# Altium PCB motorRegulator.PcbDoc
Units mil, origin at the board's own origin, x right, y up, seen from the top; angles counter-clockwise.
Board outline 1905 x 1465 mil, 2 copper layers (Top Layer, GND); 22 components, 11 nets, 56 pads, 23 vias.
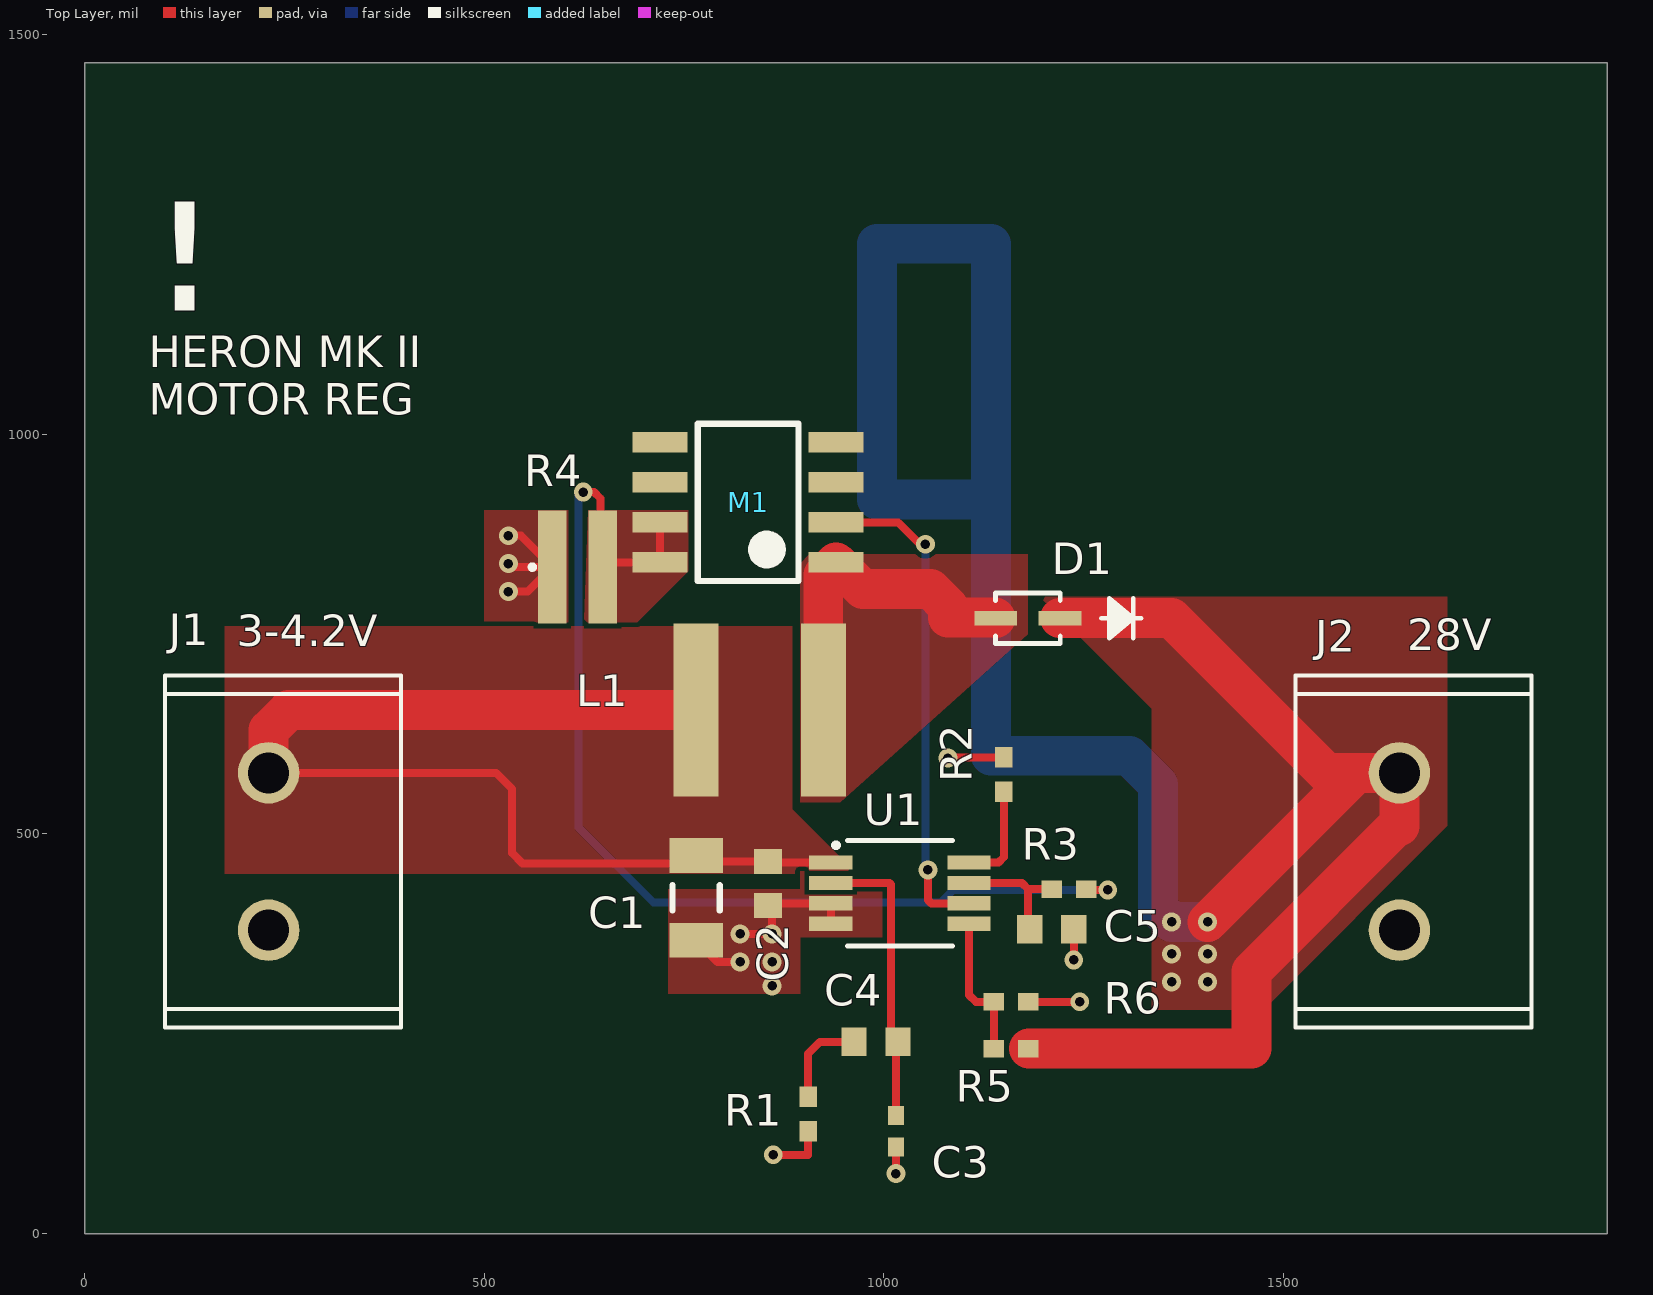
[diagram p0: Top Layer view]
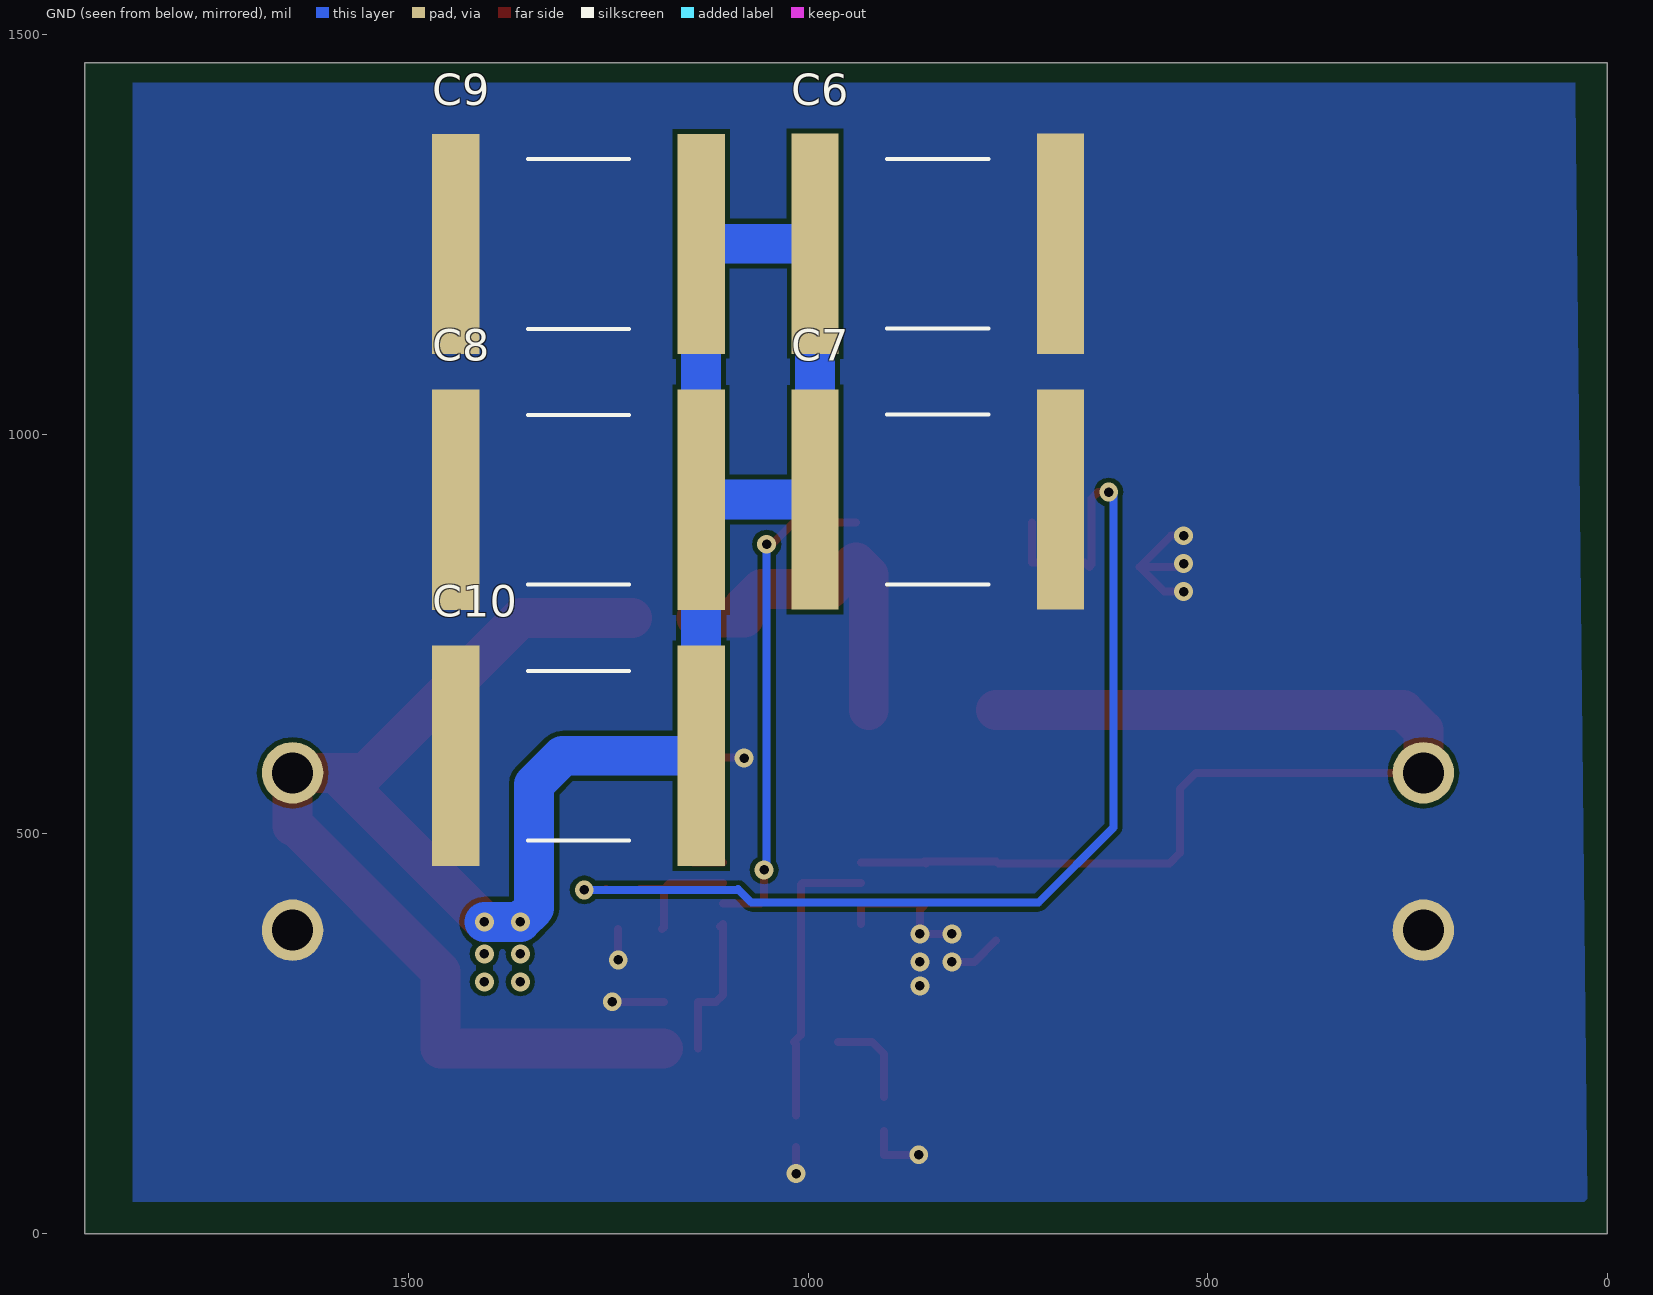
[diagram p1: GND view, seen from below]
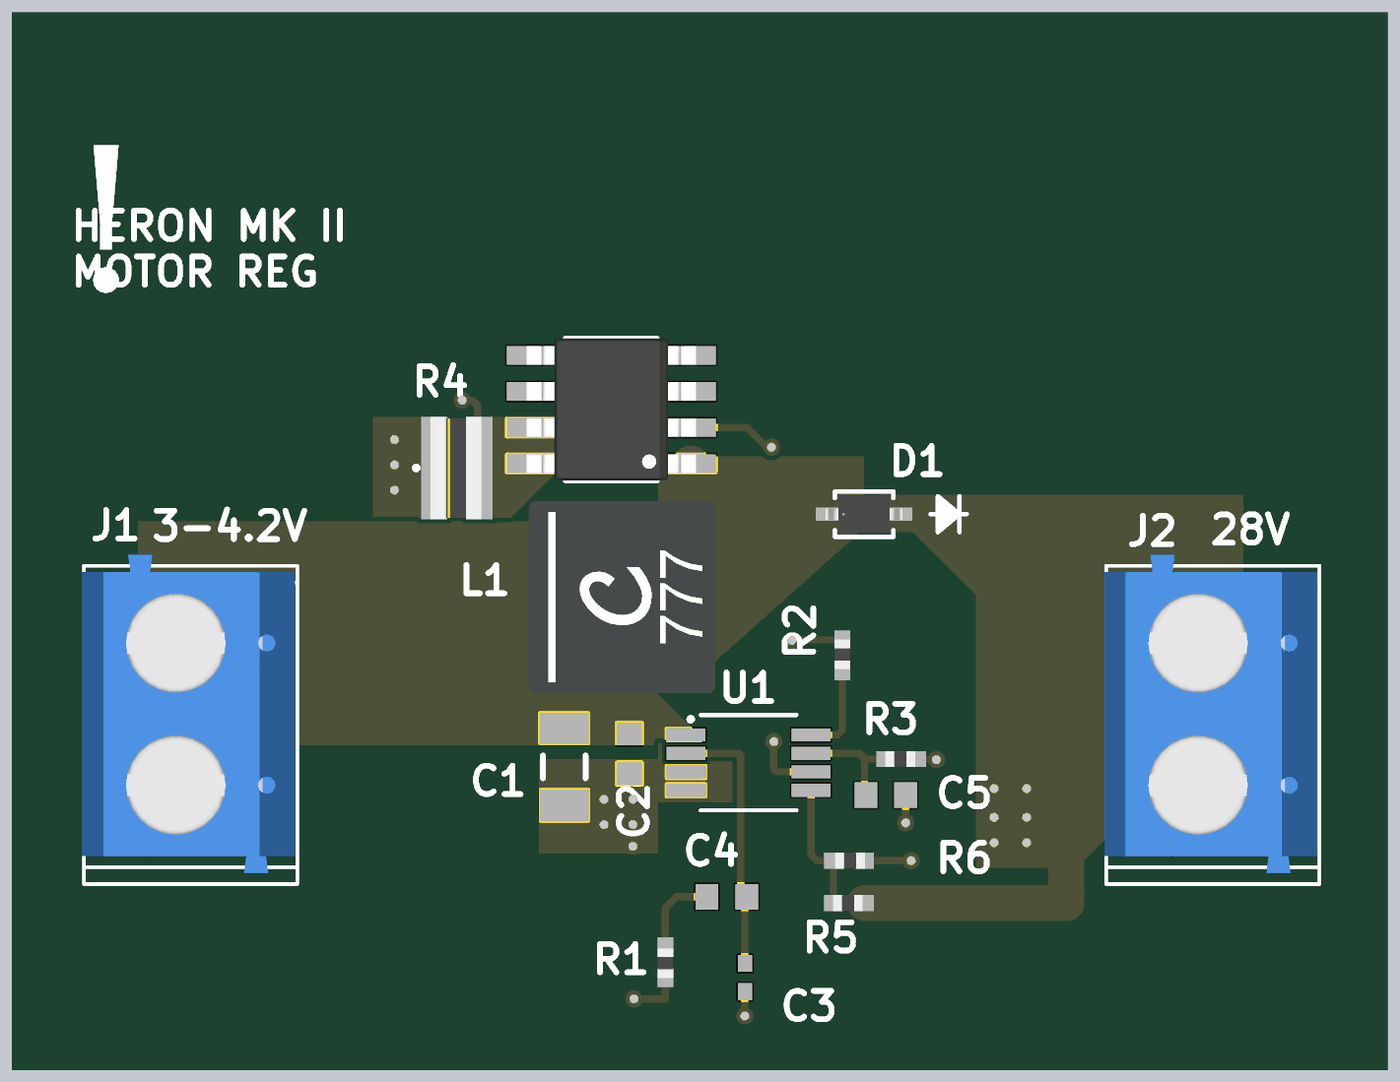
[diagram p2: 3D render of the assembled board from above, using the file's embedded part models]

## Layer stack, top to bottom
Top Solder: solder mask 0.4, Solder Resist, Dk 3.5
Top Layer: signal copper 1.4
Dielectric 1: dielectric 12.6, FR-4, Dk 4.8
GND: signal copper 1.4
Bottom Solder: solder mask 0.4, Solder Resist, Dk 3.5

## Board outline
0,0 0,1465 1905,1465 1905,0

## Design rules (kind name [scope] priority, off if disabled: settings)
AssemblyTestPointUsage [All] p1 off:
AssemblyTestpoint [All] p1 off: testpointundercomponent=TRUE minsize=40 maxsize=100 preferedsize=60 minholesize=0 maxholesize=40 preferedholesize=32 testpointgrid=1 usegrid=TRUE gridtolerance=0.01 allowsidetop=TRUE allowsidebottom=TRUE
BoardOutlineClearance [OnLayer('VCC') or OnLayer('GND')] p1: gap=20 ignorepadtopadclearanceinfootprint=FALSE // Inner layer clearance
BoardOutlineClearance BoardOutlineClearance_1 [All] p2: gap=15 ignorepadtopadclearanceinfootprint=FALSE // top and bottom layers
Clearance [All] p1: gap=6 ignorepadtopadclearanceinfootprint=FALSE
FabricationTestPointUsage [All] p1 off: valid=0 allowmultiple=FALSE
FabricationTestpoint [All] p1 off: side=3 testpointundercomponent=FALSE minsize=40 maxsize=100 preferedsize=60 minholesize=0 maxholesize=40 preferedholesize=32 testpointgrid=1 allowsidetop=TRUE allowsidebottom=TRUE usegrid=TRUE gridtolerance=0.01
HoleSize [All] p1: absolutevalues=TRUE maxlimit=248.03 minlimit=11.81 maxpercent=80.000 minpercent=20.000
HoleToHoleClearance [All] p1: gap=10 allowstackedmicrovias=FALSE
MinimumAnnularRing [All] p1: minimumring=6
MinimumSolderMaskSliver [All] p1: minsoldermaskwidth=4
PlaneConnect [All] p1: planeconnectstyle=Direct reliefexpansion=20 reliefentries=4 reliefconductorwidth=10 reliefairgap=10
PolygonConnect [All] p1: connectstyle=Direct reliefconductorwidth=10 reliefentries=4 polygonreliefangle="90 Angle" airgapwidth=10
RoomDefinition "30V Output Design" [InComponentClass('30V Output Design')] p1: confinementstyle=ConfineIn formatcopy=TRUE lockcomponents=FALSE outline 80.24,237.77 80.24,723.56 544,723.56 544,914.87 636.81,914.87 636.81,1394.6 1038.78,1394.6 1038.78,1394.25 1488.19,1394.25 1488.19,723.56 1830.2,723.56 1830.2,237.78 1203.47,237.78 1203.47,210.37 1049.21,210.37 1049.21,206.38 1040.75,206.38 1040.75,80.69 989.25,80.69 989.25,105.09 884,105.09 884,237.77
RoutingVias [All] p1: holewidth=11.81 width=23.62 viastyle="Through Hole" minholewidth=7.87 minwidth=23.62 maxholewidth=248.03 maxwidth=393.7
SilkToSilkClearance [All] p1: silktosilkclearance=0
SilkToSolderMaskClearance [IsPad] p1: minsilkscreentomaskgap=3 clearancetoexposedcopper=TRUE
SolderMaskExpansion [All] p1: expansion=2.5
UnConnectedPin [All] p1:
UnRoutedNet [All] p1: checkbadconnections=TRUE
Width [All] p1: maxlimit=100 minlimit=6 preferedwidth=10
19 further rules are at their usual default settings.

## Components (designator, comment, footprint, x,y, rotation, side; value= is the part's Value field where it differs from the comment)
C1 "Input cap" C1206 765,420 r90 top value=220uF
C2 "bypass cap" 1608[0603] 855,438.09 r90 top value=100nF
C3 "CL05C681JB5NNNC" 0402 1015,128.09 r90 top value=680pF
C4 "Cap Semi" 1608[0603] 990,240 r0 top value=15nF
C5 "CL21C100JBANNNC" 1608[0603] 1210,380.9 r180 top value=10pF
C6 "Cap Semi" "CAP-2 J-lead" 835,1238.26 r0 bottom value=47uF
C7 "" "CAP-2 J-lead" 835,918.26 r0 bottom value=47uF
C8 "" "CAP-2 J-lead" 1290,918.62 r180 bottom value=47uF
C9 "" "CAP-2 J-lead" 1290,1238.62 r180 bottom value=47uF
C10 "" "CAP-2 J-lead" 1290,598.26 r180 bottom value=47uF
D1 "PMEG6010CEH,115" SOD323F 1180,770 r180 top value=570mV
J1 "691102710002" CON2_SCREW_5.00MM_691102710002 230,478.09 r270 top
J2 "691102710002" CON2_SCREW_5.00MM_691102710002 1645,478.09 r270 top
L1 "Inductor" XAL6060-472 765,655 r0 top value=4.7uH
M1 "MotorFET" MotorFETSOIC127P590X175-8N 830,915 r180 top
R1 "" RES_CRCW_0402 905,128.09 r90 top value=12.1K
R2 "Rfadj" RES_CRCW_0402 1150,595.9 r270 top value=26.7K
R3 "Rfilt" RES_CRCW_0402 1210,430.9 r0 top value=97.6
R4 "PRL1632-R006-F-T1" RES_3216 585,834 r0 top value=Value
R5 "Rfb1" RES_CRCW_0402 1137.47,231.37 r0 top value=22.6K
R6 "Rfb2" RES_CRCW_0402 1180.47,290 r180 top value=976
U1 "Part Number: LM3478MMX/NOPB" MUA08A 1020,425.9 r0 top value=Value

## Footprints (in the part's own frame and the unit in brackets; to place one, negate y for a bottom-side part, rotate by r counter-clockwise, add the part's x,y. Pads: shape width x height; smd on the part's side, far side on the other; paste and mask are expansions set on the pad)
0402 [mm] "Chip Capacitor, Body 1.0x0.5mm, IPC High Density"
  rect 0.6x0.5 smd: 1(-0.5,0) 2(0.5,0)
  body extent -0.55,-0.3 0.55,0.3, height 1.3
1608[0603] [mm] "Chip Capacitor, Body 1.6x0.8mm, IPC High Density"
  rect 0.8x0.9 smd: 1(-0.7,0) 2(0.7,0)
  body extent -0.87,-0.48 0.87,0.48, height 1.3
C1206 [mm] "Chip Capacitor, Body 3.2x1.6mm, IPC High Density"
  rect 1.1x1.7 smd: 1(-1.35,0) 2(1.35,0)
  silkscreen extent -0.4,-0.75 0.4,0.75, body extent -1.7,-0.9 1.7,0.9, height 1.3
"CAP-2 J-lead" [mm] "KTJ500B476M76BFT00, 6.60mm x 7.80mm, Ceramic Capacitor X7R Stacked SMD, 2 J-Lead"
  rect 1.5x7 smd: 1(-3.829,-0.009) 2(3.971,-0.009)
  silkscreen extent -1.54,-2.71 1.68,2.69, body extent -3.86,-3.3 3.96,3.09, height 8.5
CON2_SCREW_5.00MM_691102710002 [mm] "2-Pos Screw terminal 5mm pitch"
  round 1.95 hole 1.3: 1(-2.5,0) 2(2.5,0)
  silkscreen extent -5.6,-3.3 5.6,4.2, body extent -5.98,-3.37 5.22,4.13, height 10.03
MotorFETSOIC127P590X175-8N [mm] "SOIC, 8-Leads, Body 4.90x3.90mm, Pitch 1.27mm, IPC Medium Density"
  rect 1.75x0.65 smd: 1(-2.8,1.905) 2(-2.8,0.635) 3(-2.8,-0.635) 4(-2.8,-1.905) 5(2.8,-1.905) 6(2.8,-0.635) 7(2.8,0.635) 8(2.8,1.905)
  silkscreen extent -1.6,-2.5 1.6,2.5, body extent -2.98,-2.5 2.98,2.5, height 1.75
MUA08A [mil]
  rect 54x18 smd: 1(-86.5,38.39) 2(-86.5,12.8) 3(-86.5,-12.8) 4(-86.5,-38.39) 5(86.5,-38.39) 6(86.5,-12.8) 7(86.5,12.8) 8(86.5,38.39)
  silkscreen extent -81,-66 66,66
RES_3216 [mm]
  rect 0.906x3.6 smd paste+0 mask+0: 1(0,0) 2(1.6,0)
  silkscreen extent -0.71,-0.08 -0.56,0.08, body extent -0.14,-1.8 1.66,1.8, height 0.55
RES_CRCW_0402 [mil]
  rect 26x22 smd paste+0 mask+0: 1(0,0) 2(43,0)
  body extent -1,-11 41,11, height 16
SOD323F [mil]
  rect 53.5x18 smd paste+0 mask+0: 1(-40.25,0) 2(40.25,0)
  silkscreen extent -142,-32 41,32, body extent -53,-27 53,26, height 43
XAL6060-472 [mm] "Power Inductor"
  rect 1.43x5.5 smd: 1(0,0) 2(4.04,0)
  body extent -1.25,-3.38 5.31,3.38, height 6

## Part data
C1: library part "Cap Semi", "CAP CER 220UF 6.3V X5R 1210", Capacitance=220uF, Case/Package=1206, Case Code (Metric)=3216, Dielectric=X5R, Manufacturer=Murata, Manufacturer Part Number=GRM31CR60J227ME11L, Max Operating Temperature=85°C, Min Operating Temperature=-55°C, Supplier Part Number 1=490-13970-1-ND, Tolerance=20%, Voltage Rating=6.3V, Case Code (Imperial)=1206, LatestRevisionDate=29-May-2009, LatestRevisionNote="IPC-7351 Footprint Added.", Length=0.126inch, Mount="Surface Mount", PackageDescription="Chip Capacitor", PackageReference=C1206, Packaging="Cut Tape", Pricing 1="1=1.52, 10=1.199, 100=0.8992, 500=0.67938, 1000=0.59945 (USD)", Published=8-Jun-2000, Publisher="Altium Limited", REACH SVHC="No SVHC", Stock 1=189904, Supplier 1=Digi-Key, Thickness=0.075inch, Voltage Rating (DC)=6.3V, Width=0.063inch
C2: library part "Cap Semi", "Capacitor (Semiconductor SIM Model) https://www.digikey.ca/product-detail/en/avx-corporation/06035C104K4T4A/478-9903-1-ND/6002664", Supplier Part Number 1=478-9903-1-ND, LatestRevisionDate=29-May-2009, LatestRevisionNote="IPC-7351 Footprint Added.", PackageDescription="Chip Capacitor", PackageReference=C1206, Published=8-Jun-2000, Publisher="Altium Limited", Supplier 1=Digi-Key
C3: library part "Cap Semi", "CL05C681JB5NNNC - comparator cap 2", Supplier Part Number 1=490-11151-1-ND, LatestRevisionDate=29-May-2009, LatestRevisionNote="IPC-7351 Footprint Added.", PackageDescription="Chip Capacitor", PackageReference=C1206, Published=8-Jun-2000, Publisher="Altium Limited", Supplier 1=Digi-Key
C4: "CGA4F2C0G1H153J085AA comparator cap", Supplier Part Number 1=445-6923-1-ND, LatestRevisionDate=29-May-2009, LatestRevisionNote="IPC-7351 Footprint Added.", PackageDescription="Chip Capacitor", PackageReference=C1206, Published=8-Jun-2000, Publisher="Altium Limited", Supplier 1=Digi-Key
C5: library part "Cap Semi", "Capacitor (Semiconductor SIM Model) filter cap", Supplier Part Number 1=399-13711-1-ND, LatestRevisionDate=29-May-2009, LatestRevisionNote="IPC-7351 Footprint Added.", PackageDescription="Chip Capacitor", PackageReference=C1206, Published=8-Jun-2000, Publisher="Altium Limited", Supplier 1=Digi-Key
C6: "EEHZA1H101P - from TI output cap", Capacitance=47uF, Case/Package=SMD/SMT, Manufacturer="United Chemi-Con", Manufacturer Part Number=KTJ500B476M76BFT00, Max Operating Temperature=125°C, Min Operating Temperature=-55°C, Supplier Part Number 1=565-4687-1-ND, Tolerance=20%, Voltage Rating=50V, LatestRevisionDate=29-May-2009, LatestRevisionNote="IPC-7351 Footprint Added.", Lead/Base Style=J-Lead, Length=0.26inch, Mount="Surface Mount", PackageDescription="Chip Capacitor", PackageReference=C1206, Packaging="Tape and Reel", Pricing 1="1=6.35, 10=5.642, 100=4.5135 (USD)", Published=8-Jun-2000, Publisher="Altium Limited", Stock 1=2228, Supplier 1=Digi-Key, Thickness=0.335inch, Width=0.307inch
C7 C8 C9 C10: library part "Cap Semi", "EEHZA1H101P - from TI output cap", Capacitance=47uF, Case/Package=SMD/SMT, Manufacturer="United Chemi-Con", Manufacturer Part Number=KTJ500B476M76BFT00, Max Operating Temperature=125°C, Min Operating Temperature=-55°C, Supplier Part Number 1=565-4687-1-ND, Tolerance=20%, Voltage Rating=50V, LatestRevisionDate=29-May-2009, LatestRevisionNote="IPC-7351 Footprint Added.", Lead/Base Style=J-Lead, Length=0.26inch, Mount="Surface Mount", PackageDescription="Chip Capacitor", PackageReference=C1206, Packaging="Tape and Reel", Pricing 1="1=6.35, 10=5.642, 100=4.5135 (USD)", Published=8-Jun-2000, Publisher="Altium Limited", Stock 1=2228, Supplier 1=Digi-Key, Thickness=0.335inch, Width=0.307inch
D1: Manufacturer=Nexperia, Supplier Part Number 1=1727-3848-1-ND, Manufacturer Name=Nexperia, Manufacturer Part Number=PMEG6010CEH,115, PackageReference=PMEG6010CEH,115, Pricing 1="1=0.46, 10=0.344, 100=0.2141, 500=0.1465, 1000=0.11269 (USD)", Stock 1=43160, Supplier 1=Digi-Key
J1 J2: "Screw terminal 0.33 mm² Number of pins 2 Wuerth Elektronik Blue 1 pc_s_", Package=None, Supplier Part Number 1=732-2028-ND, Availability=Unavailable, MF="Wurth Electronics", MP=691102710002, Price=None, SnapEDA_Link=https://www.snapeda.com/parts/691102710002/Wurth%20Electronics%20Inc./view-part/?ref=snap, Supplier 1=Digi-Key
L1: "Inductor CoilCraft", DC Resistance (DCR)=14.4mR, Inductance=4.7uH, Manufacturer=Coilcraft, Manufacturer Part Number=XAL6060-472MEB, Max DC Current=11A, Max Operating Temperature=125°C, Min Operating Temperature=-40°C, Package Quantity=21, Self Resonant Frequency=21MHz, Test Frequency=100kHz, Tolerance=20%, Code_IEC=1005, Code_JEITA=0402, Core Material=Composite, Height=6.1mm, LatestRevisionDate=29-May-2009, LatestRevisionNote="IPC-7351 Footprint Added.", Lead Free="Contains Lead", Length=6.76mm, PackageDescription="Chip Inductor", PackageReference=0402-A, Packaging="Tape and Reel", Pricing 1="1=2.58, 100=2.25, 250=1.76, 500=1.05, 1000=0.82, 2500=0.71 (USD)", Published=8-Jun-2000, Publisher="Altium Limited", Shielding=Shielded, Stock 1=0, Supplier 1="Coilcraft Direct", Supplier Part Number 1=XAL6060-472MEB, Termination=SMD/SMT, Width=6.56mm
R1: library part Res3, "comparator resistor", Case/Package=0402, Case Code (Metric)=1005, Manufacturer=Vishay, Manufacturer Part Number=CRCW040211K5FKED, Max Operating Temperature=155°C, Max Power Dissipation=63mW, Min Operating Temperature=-55°C, Package Quantity=10, Resistance=11.5kR, Supplier Part Number 1=541-11.5KLCT-ND, Temperature Coefficient=100ppm/°C, Tolerance=1%, Voltage Rating=50V, Case Code (Imperial)=0402, ComponentLink1Description=http://www.vishay.com/docs/20035/dcrcwe3.pdf?src-supplier=Digi-Key, ComponentLink1URL=http://www.vishay.com/docs/20035/dcrcwe3.pdf?src-supplier=Digi-Key, ComponentLink2Description=http://www.mouser.com/ds/2/427/dcrcwe3-109170.pdf?src-supplier=Mouser, ComponentLink2URL=http://www.mouser.com/ds/2/427/dcrcwe3-109170.pdf?src-supplier=Mouser, ComponentLink3Description=http://www.farnell.com/datasheets/1697337.pdf?src-supplier=Farnell, ComponentLink3URL=http://www.farnell.com/datasheets/1697337.pdf?src-supplier=Farnell, ComponentLink4Description=http://uk.rs-online.com/webdocs/0d98/0900766b80d98824.pdf?src-supplier=RSComponents, ComponentLink4URL=http://uk.rs-online.com/webdocs/0d98/0900766b80d98824.pdf?src-supplier=RSComponents, ComponentLink5Description=http://www.farnell.com/datasheets/1697337.pdf?src-supplier=Element14, ComponentLink5URL=http://www.farnell.com/datasheets/1697337.pdf?src-supplier=Element14, ComponentLink6Description=https://www.alliedelec.com/m/d/0c934d6939ccefa68dbe0b96d821c8cf.pdf?src-supplier=Allied+Electronics, ComponentLink6URL=https://www.alliedelec.com/m/d/0c934d6939ccefa68dbe0b96d821c8cf.pdf?src-supplier=Allied+Electronics, ComponentLink7Description=http://www.farnell.com/datasheets/1824995.pdf?src-supplier=Element14, ComponentLink7URL=http://www.farnell.com/datasheets/1824995.pdf?src-supplier=Element14, ComponentLink8Description=http://www.vishay.com/docs/20035/dcrcwe3.pdf?src-supplier=Avnet, ComponentLink8URL=http://www.vishay.com/docs/20035/dcrcwe3.pdf?src-supplier=Avnet, ComponentLink9Description=http://www.farnell.com/datasheets/2111203.pdf?src-supplier=Element14, ComponentLink9URL=http://www.farnell.com/datasheets/2111203.pdf?src-supplier=Element14, ComponentLink10Description=http://www.vishay.com/docs/20035/dcrcwe3.pdf?src-supplier=Avnet+Europe, ComponentLink10URL=http://www.vishay.com/docs/20035/dcrcwe3.pdf?src-supplier=Avnet+Europe, ComponentLink11Description=http://www.farnell.com/datasheets/2045674.pdf?src-supplier=Element14, ComponentLink11URL=http://www.farnell.com/datasheets/2045674.pdf?src-supplier=Element14, Composition="Thick Film", Contact Plating=Tin, Depth=0.5mm, Features="Automotive AEC-Q200", Height=0.35mm, LatestRevisionDate=29-May-2009, LatestRevisionNote="IPC-7351 Footprint Added.", Lead Free="Lead Free", Length=1mm, Military Standard=Not, Number of Pins=2, Number of Terminations=2, PackageDescription="Chip Resistor", PackageReference=J1-0603, Packaging="Tape and Reel", Power Rating=63mW, Pricing 1="1=0.1, 10=0.042, 100=0.017, 1000=0.00765, 2500=0.00664, 5000=0.00549 (USD)", Published=8-Jun-2000, Publisher="Altium Limited", Radiation Hardening=No, REACH SVHC=Unknown, Stock 1=7488, Supplier 1=Digi-Key, Termination=SMD/SMT, Voltage Rating (DC)=50V, Weight=2.3E-05oz, Width=0.02inch
R2: library part Res3, "Resistor CRCW040226K7FKED 0402", Case/Package=0402, Case Code (Metric)=1005, Manufacturer=Vishay, Manufacturer Part Number=CRCW040226K7FKED, Max Operating Temperature=155°C, Max Power Dissipation=63mW, Min Operating Temperature=-55°C, Package Quantity=10, Resistance=26.7kR, Supplier Part Number 1=541-26.7KLCT-ND, Temperature Coefficient=100ppm/°C, Tolerance=1%, Voltage Rating=50V, Case Code (Imperial)=0402, ComponentLink1Description=http://www.vishay.com/docs/20035/dcrcwe3.pdf?src-supplier=Digi-Key, ComponentLink1URL=http://www.vishay.com/docs/20035/dcrcwe3.pdf?src-supplier=Digi-Key, ComponentLink2Description=http://www.mouser.com/ds/2/427/dcrcwe3-109170.pdf?src-supplier=Mouser, ComponentLink2URL=http://www.mouser.com/ds/2/427/dcrcwe3-109170.pdf?src-supplier=Mouser, ComponentLink3Description=http://www.farnell.com/datasheets/2045673.pdf?src-supplier=Element14, ComponentLink3URL=http://www.farnell.com/datasheets/2045673.pdf?src-supplier=Element14, ComponentLink4Description=http://www.vishay.com/docs/20035/dcrcwe3.pdf?src-supplier=Avnet, ComponentLink4URL=http://www.vishay.com/docs/20035/dcrcwe3.pdf?src-supplier=Avnet, ComponentLink5Description=https://www.alliedelec.com/m/d/0c934d6939ccefa68dbe0b96d821c8cf.pdf?src-supplier=Allied+Electronics, ComponentLink5URL=https://www.alliedelec.com/m/d/0c934d6939ccefa68dbe0b96d821c8cf.pdf?src-supplier=Allied+Electronics, ComponentLink6Description=http://www.farnell.com/datasheets/1697337.pdf?src-supplier=Element14, ComponentLink6URL=http://www.farnell.com/datasheets/1697337.pdf?src-supplier=Element14, ComponentLink7Description=http://www.vishay.com/docs/20035/dcrcwe3.pdf?src-supplier=Future+Electronics, ComponentLink7URL=http://www.vishay.com/docs/20035/dcrcwe3.pdf?src-supplier=Future+Electronics, Composition="Thick Film", Contact Plating=Tin, Depth=0.5mm, Features="Automotive AEC-Q200", Height=0.35mm, LatestRevisionDate=29-May-2009, LatestRevisionNote="IPC-7351 Footprint Added.", Lead Free="Lead Free", Length=1mm, Military Standard=Not, Number of Pins=2, Number of Terminations=2, PackageDescription="Chip Resistor", PackageReference=J1-0603, Packaging="Tape and Reel", Power Rating=63mW, Pricing 1="1=0.1, 10=0.042, 100=0.017, 1000=0.00765, 2500=0.00664, 5000=0.00549 (USD)", Published=8-Jun-2000, Publisher="Altium Limited", Radiation Hardening=No, REACH SVHC=Unknown, Stock 1=961, Supplier 1=Digi-Key, Termination=SMD/SMT, Voltage Rating (DC)=50V, Weight=2.3E-05oz, Width=0.02inch, Working Voltage=50V
R3: library part Res3, "Resistor CRCW040297R6FKED 0402", Case/Package=0402, Case Code (Metric)=1005, Manufacturer=Vishay, Manufacturer Part Number=CRCW040297R6FKED, Max Operating Temperature=155°C, Max Power Dissipation=63mW, Min Operating Temperature=-55°C, Package Quantity=10, Resistance=97.6R, Supplier Part Number 1=541-97.6LCT-ND, Temperature Coefficient=100ppm/°C, Tolerance=1%, Voltage Rating=50V, Case Code (Imperial)=0402, ComponentLink1Description=http://www.mouser.com/ds/2/427/dcrcwe3-109170.pdf?src-supplier=Mouser, ComponentLink1URL=http://www.mouser.com/ds/2/427/dcrcwe3-109170.pdf?src-supplier=Mouser, ComponentLink2Description=http://www.vishay.com/docs/20035/dcrcwe3.pdf?src-supplier=Avnet, ComponentLink2URL=http://www.vishay.com/docs/20035/dcrcwe3.pdf?src-supplier=Avnet, ComponentLink3Description=http://www.vishay.com/docs/20035/dcrcwe3.pdf?src-supplier=Digi-Key, ComponentLink3URL=http://www.vishay.com/docs/20035/dcrcwe3.pdf?src-supplier=Digi-Key, ComponentLink4Description=http://www.farnell.com/datasheets/2111203.pdf?src-supplier=Element14, ComponentLink4URL=http://www.farnell.com/datasheets/2111203.pdf?src-supplier=Element14, ComponentLink5Description=http://www.farnell.com/datasheets/2045674.pdf?src-supplier=Element14, ComponentLink5URL=http://www.farnell.com/datasheets/2045674.pdf?src-supplier=Element14, Composition="Thick Film", Contact Plating=Tin, Depth=0.5mm, Features="Automotive AEC-Q200", Height=0.016inch, LatestRevisionDate=29-May-2009, LatestRevisionNote="IPC-7351 Footprint Added.", Lead Free="Lead Free", Length=1mm, Military Standard=Not, Number of Pins=2, Number of Terminations=2, PackageDescription="Chip Resistor", PackageReference=J1-0603, Packaging="Tape and Reel", Power Rating=63mW, Pricing 1="1=0.1, 10=0.042, 100=0.017, 1000=0.00765, 2500=0.00664, 5000=0.00549 (USD)", Published=8-Jun-2000, Publisher="Altium Limited", Radiation Hardening=No, REACH SVHC=Unknown, Stock 1=16178, Supplier 1=Digi-Key, Termination=SMD/SMT, Voltage Rating (DC)=50V, Weight=2.3E-05oz, Width=0.5mm
R4: library part PRL1632-R006-F-T, "No Description Available", Built_By=EMA_UL_Team, Copyright="Copyright (C) 2018 Accelerated Designs. All rights reserved", Manufacturer_Part_Number=PRL1632-R006-F-T1, RefDes=RefDes, Type=DEV, Vendor=Susumu
R5: library part Res3, "Resistor CRCW040222K6FKED 0402", Case/Package=0402, Case Code (Metric)=1005, Manufacturer=Vishay, Manufacturer Part Number=CRCW040222K6FKED, Max Operating Temperature=155°C, Max Power Dissipation=63mW, Min Operating Temperature=-55°C, Package Quantity=10, Resistance=22.6kR, Supplier Part Number 1=541-22.6KLCT-ND, Temperature Coefficient=100ppm/°C, Tolerance=1%, Voltage Rating=50V, Case Code (Imperial)=0402, ComponentLink1Description=http://www.vishay.com/docs/20035/dcrcwe3.pdf?src-supplier=Digi-Key, ComponentLink1URL=http://www.vishay.com/docs/20035/dcrcwe3.pdf?src-supplier=Digi-Key, ComponentLink2Description=http://www.farnell.com/datasheets/1697337.pdf?src-supplier=Element14, ComponentLink2URL=http://www.farnell.com/datasheets/1697337.pdf?src-supplier=Element14, ComponentLink3Description=http://www.vishay.com/docs/20035/dcrcwe3.pdf?src-supplier=Avnet, ComponentLink3URL=http://www.vishay.com/docs/20035/dcrcwe3.pdf?src-supplier=Avnet, ComponentLink4Description=http://uk.rs-online.com/webdocs/0d98/0900766b80d98824.pdf?src-supplier=RSComponents, ComponentLink4URL=http://uk.rs-online.com/webdocs/0d98/0900766b80d98824.pdf?src-supplier=RSComponents, ComponentLink5Description=http://www.vishay.com/docs/20035/dcrcwe3.pdf?src-supplier=Future+Electronics, ComponentLink5URL=http://www.vishay.com/docs/20035/dcrcwe3.pdf?src-supplier=Future+Electronics, Composition="Thick Film", Contact Plating=Tin, Depth=0.5mm, Features="Automotive AEC-Q200", Height=0.35mm, LatestRevisionDate=29-May-2009, LatestRevisionNote="IPC-7351 Footprint Added.", Length=1mm, Military Standard=Not, Number of Pins=2, Number of Terminations=2, PackageDescription="Chip Resistor", PackageReference=J1-0603, Packaging="Tape and Reel", Power Rating=63mW, Pricing 1="1=0.1, 10=0.042, 100=0.017, 1000=0.00765, 2500=0.00664, 5000=0.00549 (USD)", Published=8-Jun-2000, Publisher="Altium Limited", Radiation Hardening=No, REACH SVHC=Unknown, Stock 1=23178, Supplier 1=Digi-Key, Termination=SMD/SMT, Weight=2.3E-05oz, Width=0.02inch
R6: library part Res3, "Resistor CRCW0402976RFKED 0402", Case/Package=0402, Case Code (Metric)=1005, Manufacturer=Vishay, Manufacturer Part Number=CRCW0402976RFKED, Max Operating Temperature=155°C, Max Power Dissipation=63mW, Min Operating Temperature=-55°C, Package Quantity=10, Resistance=976R, Supplier Part Number 1=541-976LCT-ND, Temperature Coefficient=100ppm/°C, Tolerance=1%, Voltage Rating=50V, Case Code (Imperial)=0402, ComponentLink1Description=http://www.vishay.com/docs/20035/dcrcwe3.pdf?src-supplier=Digi-Key, ComponentLink1URL=http://www.vishay.com/docs/20035/dcrcwe3.pdf?src-supplier=Digi-Key, ComponentLink2Description=http://www.vishay.com/docs/20035/dcrcwe3.pdf?src-supplier=Avnet, ComponentLink2URL=http://www.vishay.com/docs/20035/dcrcwe3.pdf?src-supplier=Avnet, ComponentLink3Description=http://www.farnell.com/datasheets/125364.pdf?src-supplier=Element14, ComponentLink3URL=http://www.farnell.com/datasheets/125364.pdf?src-supplier=Element14, ComponentLink4Description=http://www.vishay.com/docs/20035/dcrcwe3.pdf?src-supplier=Future+Electronics, ComponentLink4URL=http://www.vishay.com/docs/20035/dcrcwe3.pdf?src-supplier=Future+Electronics, ComponentLink5Description=https://www.alliedelec.com/m/d/0c934d6939ccefa68dbe0b96d821c8cf.pdf?src-supplier=Allied+Electronics, ComponentLink5URL=https://www.alliedelec.com/m/d/0c934d6939ccefa68dbe0b96d821c8cf.pdf?src-supplier=Allied+Electronics, ComponentLink6Description=http://www.farnell.com/datasheets/1697337.pdf?src-supplier=Element14, ComponentLink6URL=http://www.farnell.com/datasheets/1697337.pdf?src-supplier=Element14, ComponentLink7Description=http://www.farnell.com/datasheets/2045673.pdf?src-supplier=Element14, ComponentLink7URL=http://www.farnell.com/datasheets/2045673.pdf?src-supplier=Element14, ComponentLink8Description=http://www.mouser.com/ds/2/427/dcrcwe3-109170.pdf?src-supplier=Mouser, ComponentLink8URL=http://www.mouser.com/ds/2/427/dcrcwe3-109170.pdf?src-supplier=Mouser, Composition="Thick Film", Contact Plating=Tin, Depth=0.5mm, Features="Automotive AEC-Q200", Height=0.35mm, LatestRevisionDate=29-May-2009, LatestRevisionNote="IPC-7351 Footprint Added.", Lead Free="Lead Free", Length=1mm, Military Standard=Not, Number of Pins=2, Number of Terminations=2, PackageDescription="Chip Resistor", PackageReference=J1-0603, Packaging="Tape and Reel", Power Rating=63mW, Pricing 1="1=0.1, 10=0.042, 100=0.017, 1000=0.00765, 2500=0.00664, 5000=0.00549 (USD)", Published=8-Jun-2000, Publisher="Altium Limited", Radiation Hardening=No, REACH SVHC=Unknown, Stock 1=305, Supplier 1=Digi-Key, Termination=SMD/SMT, Voltage Rating (DC)=50V, Weight=2.3E-05oz, Width=0.02inch
U1: library part LM3478MMX/NOPB, "No Description Available", Built_By=EMA_UL_Team, Copyright="Copyright (C) 2018 Accelerated Designs. All rights reserved", Manufacturer_Part_Number=LM3478MMX/NOPB, RefDes=RefDes, Type=DEV, Vendor="Texas Instruments"

## Via types
v1: diameter 23.62, hole 11.81, Top Layer to GND, tented both sides, 23 vias

## Nets (pads, with @x,y where several pads share a name; then routed paths per layer and width w, separated by ;. In a path a pad name is that pad's centre, name@x,y a point inside that pad or via, vN(x,y) a via of type N, cw(c..) or ccw(c..) an arc to the next point about the centre after c; other vN are vias at no path point)
DR: M1.2 U1.6 | length 625.9
  Top Layer w10: M1.2 1017.56,890 1044.94,862.62 v1(1051.87,862.62) ; v1(1055,455) 1055,417.44 1059.34,413.1 U1.6
  GND w10: v1(1055,455) 1051.87,458.13 v1(1051.87,862.62) v1@1055.05,862.62
FB: R5.1 R6.2 U1.5 | length 187.1
  Top Layer w10: U1.5@1110,384.01 U1.5 1106.5,298.5 1115,290 R6.2 R5.1
GND: C1.1 C2.1 C3.1 C5.1 C6.1 C7.1 C8.1 C9.1 C10.1 J1.2 J2.2 R1.1 R2.1 R4.1 R6.1 U1.3 U1.4 | length 712.1
  Top Layer w10: v1(530,803.26) 554.26,803.26 R4.1 ; v1(530,838.26) 534.26,834 R4.1 ; v1(530,873.26) 545.74,873.26 R4.1 ; C1.1 791.85,340 v1(820,340) ; 832.44,375 v1(860,375) 860,405.53 C2.1 857.57,413.1 U1.3 U1.4 ; v1(861.44,98.56) 905,98.56 R1.1 ; v1(1015,75) C3.1 ; v1(1080,595) 1080.9,595.9 R2.1 ; R6.1 v1(1245,290) ; v1(1237.56,342.44) C5.1
  other v1: 860,310 860,340 820,375
Isense: C5.2 R3.1 U1.7 | length 157.5
  Top Layer w10: U1.7 1172.68,438.69 1180.47,430.9 ; C5.2 1180.47,382.87 1180.47,430.9 ; R3.1 1180.47,430.9
NetC3_2: C3.2 C4.2 U1.2 | length 370
  Top Layer w10: U1.2 1007.2,438.69 1009,436.9 1009,248.56 C4.2 1015,237.44 C3.2
NetC4_1: C4.1 R1.2 | length 117.6
  Top Layer w10: R1.2 905,225 920,240 C4.1
NetD1_2: D1.2 L1.2 M1.1 | length 428.5
  Top Layer w50: L1.2 924.06,823.82 M1.1 973.62,806.62 1058.38,806.62 1080,785 1080,770.9 1138.85,770.9 D1.2
NetM1_7: M1.7 M1.8 R3.2 R4.2 | length 1397.5
  Top Layer w10: v1(623.72,927.81) 637.19,927.81 645,920 645,836.99 R4.2 653.99,840 M1.8 M1.7 ; R3.2 1253.9,430 v1(1280,430)
  GND w10: v1(623.72,927.81) 617.81,927.81 617.81,508.09 711.9,414 1070.63,414 1087.53,430.9 1088.42,430 v1(1280,430)
NetR2_2: R2.2 U1.8 | length 128.2
  Top Layer w10: U1.8 1143.39,464.28 1150,470.9 R2.2
Vin: C1.2 C2.2 J1.1 L1.1 U1.1 | length 1400
  Top Layer w10: J1.1 514.38,576.51 534.38,556.51 534.38,476.51 547.69,463.21 761.95,463.21 764.4,465.65 C2.2 ; C2.2@852.56,463.21 853.64,464.28 U1.1
  Top Layer w50: J1.1 230,630 255,655 L1.1
Vout: C6.2 C7.2 C8.2 C9.2 C10.2 D1.1 J2.1 R5.2 | length 3163.4
  Top Layer w50: R5.2@1181.47,231.37 1460,231.37 1460,328.15 1641.85,510 1645,510 J2.1 1591.52,576.52 ; D1.1 1360,770 1553.48,576.52 1591.52,576.52 ; v1(1405,390) 1591.52,576.52
  GND w50: C8.2@1133.31,918.62 C7.2 C6.2 C9.2@1133.31,1238.62 ; C9.2 C8.2 C10.2 1307.09,597.91 1342.83,562.17 1342.83,407.17 v1(1360,390) v1(1405,390)
  other v1: 1360,315 1405,315 1360,350 1405,350
pads on no net: M1.3 M1.4 M1.5 M1.6

## Polygon pours and split planes (outlines as drawn)
Vout on Top Layer "Top Layer-Vout" (solid, pour order 94): 1705,796.91 1195,796.91 1335,656.91 1335,280 1475,280 1705,510
GND on Top Layer "Top Layer-GND" (solid, remove dead copper, pour order 20): 730,430.9 895,430.9 895,480.9 1145,480.9 1145,370.9 895,370.9 895,300 730,300
GND on Top Layer "Top Layer-GND 1" (solid, pour order 84): 500,905 605,905 605,765 500,765
Vin on Top Layer "Top Layer-Vin" (solid, pour order 82): 175,760 885,760 885,530.9 960,455.9 954.1,450 175,450
NetD1_2 on Top Layer "Top Layer-NetD1_2" (solid, pour order 78): 1180,850 906.74,850 895,838.26 895,540 945,540 1180,750
no net on Top Layer "Top Layer-No Net 4" (solid, pour order 76): 1165,780
NetM1_7 on Top Layer "Top Layer-NetM1_7" (solid, pour order 74): 630,905 755,905 755,828.82 691.18,765 625,765
no net on Top Layer "Top Layer-No Net 5" (solid, pour order 72): 625,960
no net on Top Layer "Top Layer-No Net 6" (solid, pour order 68): 610,1095
no net on Top Layer "Top Layer-No Net 2" (solid, pour order 58): 870,400
no net on Top Layer "Top Layer-No Net 3" (solid, pour order 56): 210,350
no net on Top Layer "Top Layer-No Net 1" (solid, pour order 52): 870,490
no net on Top Layer "Top Layer-No Net" (solid, pour order 18): 895,480.9
GND on GND "NONET_L02_P090" (solid, pour order 90): 40,1425 40,1440 1845,1440 1845,40 1835,40 25,40

## Silkscreen, mask and mechanical layers (free items; w line width, h text height)
Top Overlay:
  text "!" at 75,1080 h393.7
  text "HERON MK II / MOTOR REG" at 80,1024.92 h39.37
  text "3-4.2V" at 190,735 h39.37
  text "28V" at 1655,730 h39.37
Mechanical 6:
  lines w62.99: 55.08,15.98 195,15.98 ; 410,12.99 1405,12.99 ; 1625,5 1780,5

## Text inside footprints (layer, text, board x,y; h text height)
J1: Mechanical 4 "1" at 125.67,621.79 h73.82 r270; Mechanical 4 "1" at 125.67,621.79 h73.82 r270
J2: Mechanical 4 "1" at 1540.67,621.79 h73.82 r270; Mechanical 4 "1" at 1540.67,621.79 h73.82 r270